# Altium PCB razbot_V02.PcbDoc
Units mm, origin at the board's own origin, x right, y up, seen from the top; angles counter-clockwise.
Board outline 54.86 x 64.9 mm, 2 copper layers (Top Layer, Bottom Layer); 56 components, 76 nets, 244 pads, 71 vias.
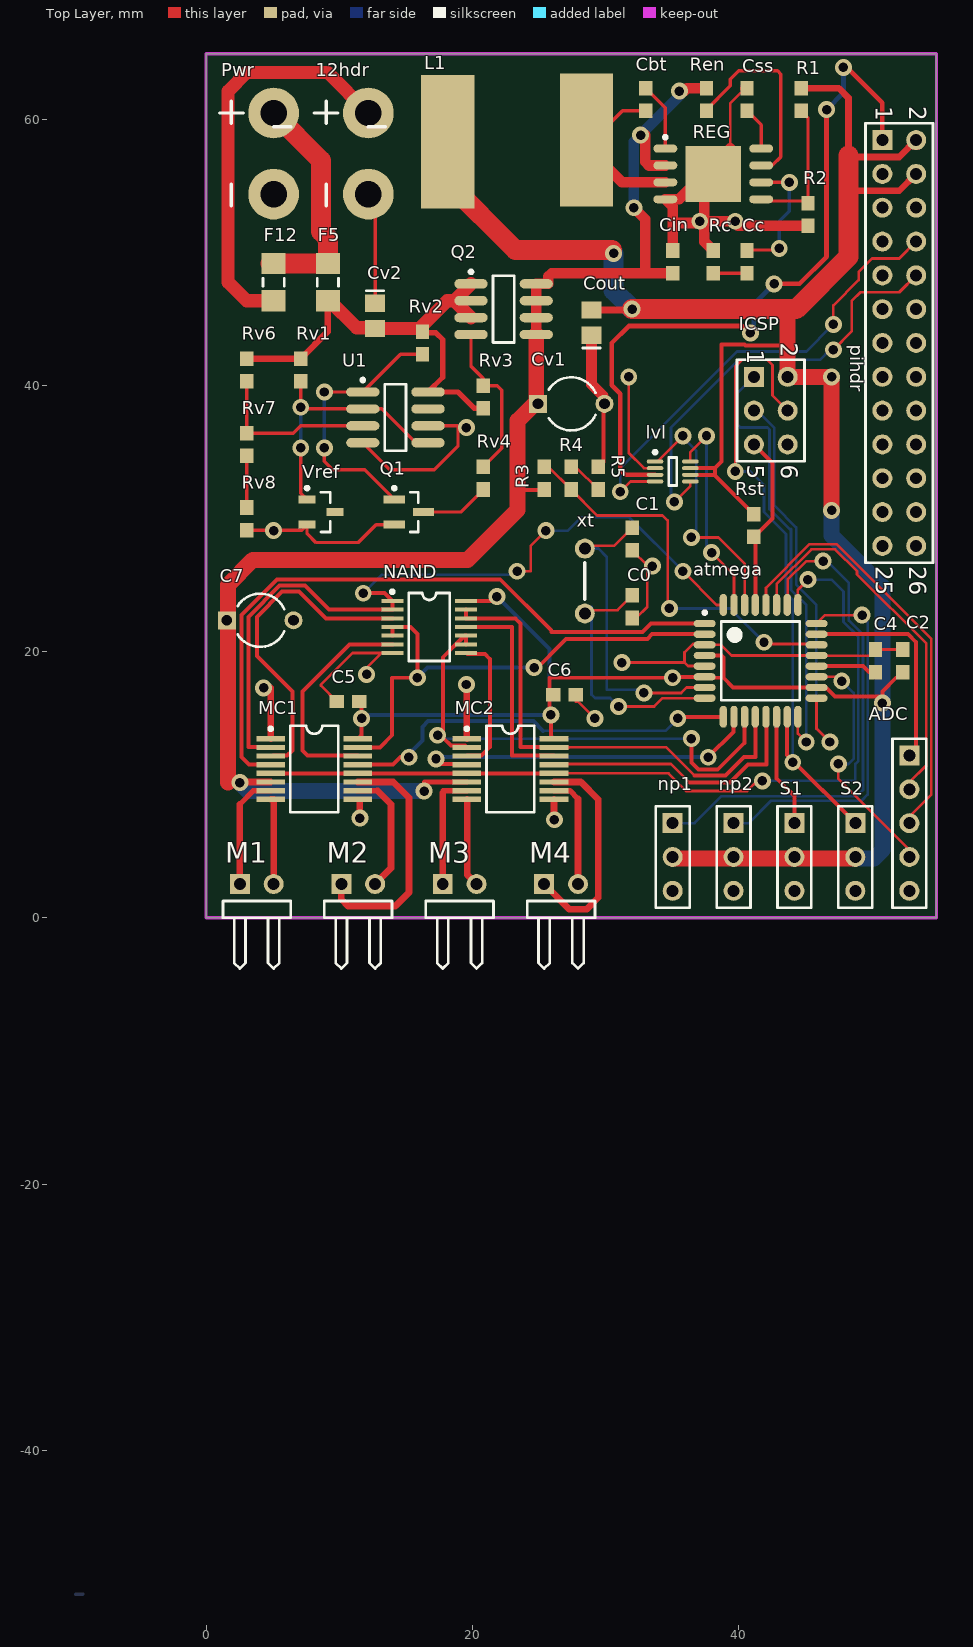
[diagram p0: Top Layer view]
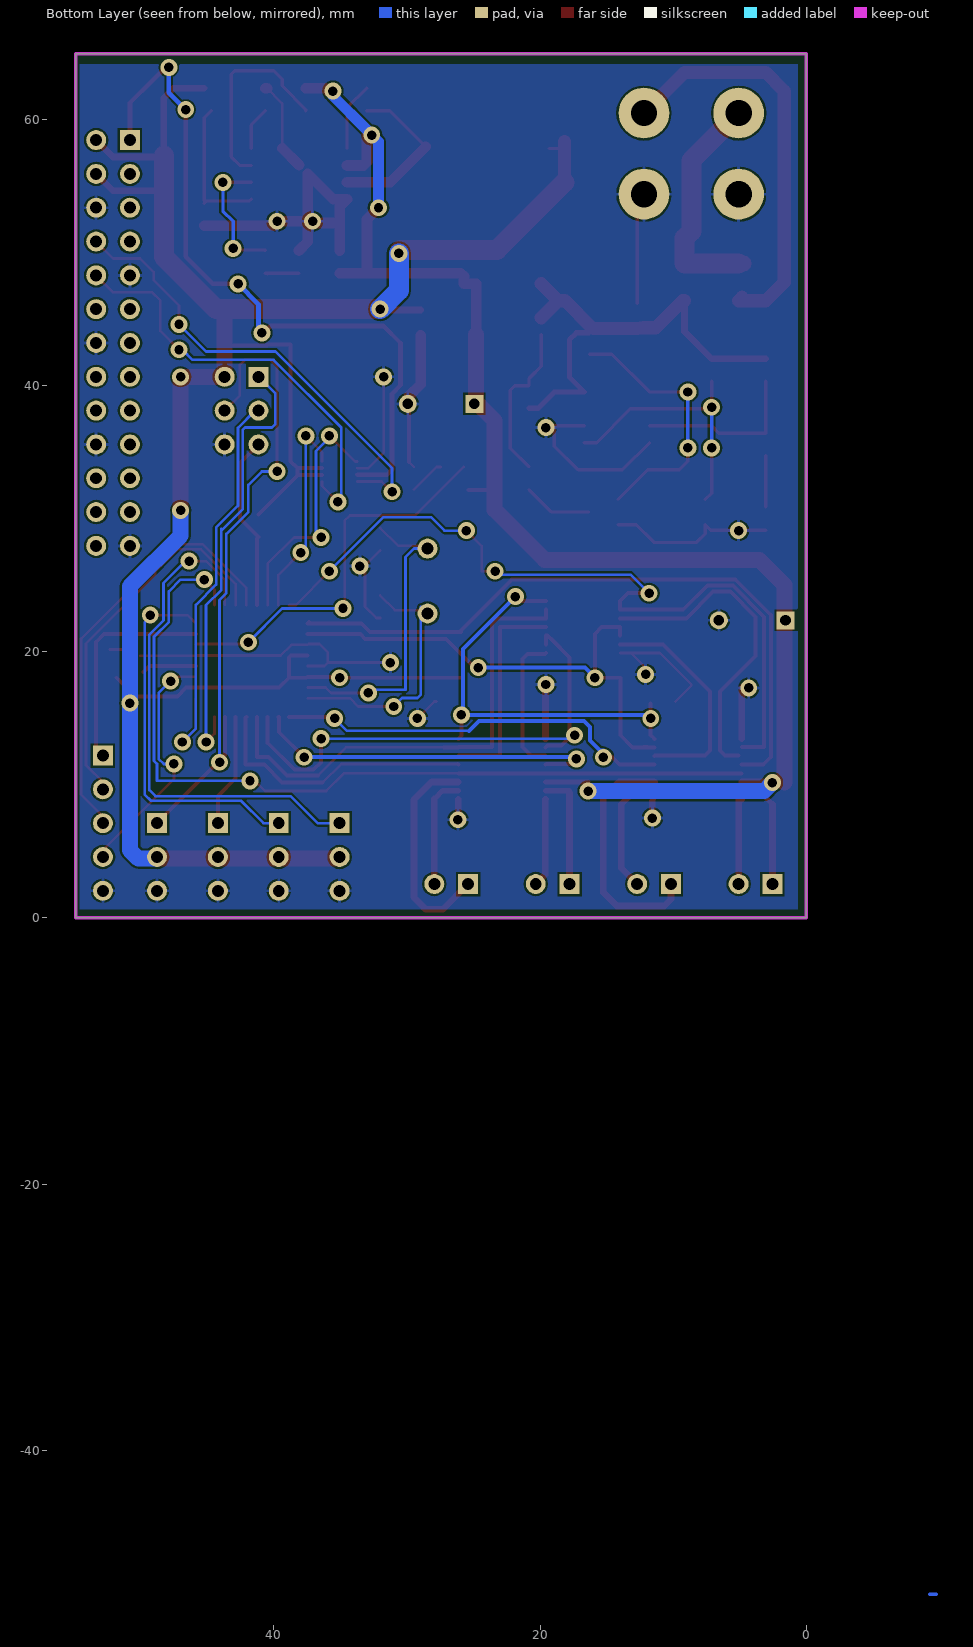
[diagram p1: Bottom Layer view, seen from below]

## Layer stack, top to bottom
Top Layer: signal copper 0.0356
Dielectric: core 0.32, FR-4, Dk 4.8
Bottom Layer: signal copper 0.0356

## Board outline
0,0 54.864,0 54.864,64.897 0,64.897

## Design rules (kind name [scope] priority, off if disabled: settings)
Clearance [All] p1: gap=0.15
PolygonConnect [All] p1: connectstyle=Relief reliefconductorwidth=0.254 reliefentries=4 polygonreliefangle="90 Angle"
RoutingVias [All] p1: holewidth=0.711 width=1.27 viastyle="Through Hole" minholewidth=0.711 minwidth=1.27 maxholewidth=0.711 maxwidth=1.27
SilkscreenOverComponentPads [All] p1: minsilkscreentomaskgap=0.254
SolderMaskExpansion [All] p1: expansion=0.102
TestPointUsage [All] p1: valid=0 allowmultiple=FALSE
Testpoint [All] p1: side=15 testpointundercomponent=TRUE minsize=1.016 maxsize=2.54 preferedsize=1.524 minholesize=0 maxholesize=1.016 preferedholesize=0.813 testpointgrid=0.025 style=1023 order=0-112345678
Width gnd [All] p1: maxlimit=2 minlimit=0.2 preferedwidth=0.2
Width 3.3V [InNet('+3.3V')] p2: maxlimit=1 minlimit=0.254 preferedwidth=0.35
Width 5V [InNet('+5V')] p3: maxlimit=2 minlimit=0.2 preferedwidth=0.35
Width Vbatt [InNet('VBATT')] p4: maxlimit=1.5 minlimit=0.254 preferedwidth=0.8
Width reg1 [InNet('NetCbt_1')] p5: maxlimit=1 minlimit=0.254 preferedwidth=0.3
Width pwr1 [InNet('NetF5_1')] p6: maxlimit=1.5 minlimit=0.254 preferedwidth=1
Width pwr3 [InNet('NetCv2_2')] p7: maxlimit=1 minlimit=0.2 preferedwidth=1
Width pwr2 [InNet('Net12hdr_2')] p8: maxlimit=1 minlimit=0.254 preferedwidth=1
Width motorpins [InNetClass('motorpins')] p9: maxlimit=1 minlimit=0.3 preferedwidth=0.4
Width [All] p10: maxlimit=0.254 minlimit=0.2 preferedwidth=0.254 toplayer_prefwidth=0.2 bottomlayer_prefwidth=0.2 minimp=50.000000 maximp=50.000000 favimp=50.000000
23 further rules are at their usual default settings.

## Classes and differential pairs
component class LwVlt: Cv1 Cv2 Q1 Q2 Rv1 Rv2 Rv3 Rv4 Rv6 Rv7 Rv8 U1 Vref
component class razbot: 12hdr ADC atmega C0 C1 C2 C4 F5 F12 ICSP lvl np1 np2 pihdr Pwr R3 R4 R5 Rst S1 S2 xt
component class U_MotorDriverToshiba: C5 C6 C7 M1 M2 M3 M4 MC1 MC2 NAND
component class U_PwrSupply: Cbt Cc Cin Cout Css L1 R1 R2 Rc REG Ren

## Components (designator, comment, footprint, x,y, rotation, side; value= is the part's Value field where it differs from the comment)
12hdr "Hdr12" PwrPlug1 12.192,54.356 r90 top
ADC "A0A4A5A6A7" HDR1X5 52.832,12.192 r270 top
atmega "ATmega328P-AUR" TQFP32_N 41.656,19.304 r0 top
C0 "20pf 0603" J1-0603 32.004,23.368 r90 top
C1 "20pf 0603" J1-0603 32.004,28.448 r90 top
C2 "0.1uF 0603" J1-0603 52.324,19.304 r270 top
C4 "0.1uF 0603" J1-0603 50.292,19.304 r270 top
C5 "0.1uF 0603" J1-0603 10.668,16.256 r0 top
C6 "0.1uF 0603" J1-0603 26.924,16.764 r180 top
C7 "20uF EL" CAPR5-4X5 4.064,22.352 r0 top
Cbt "10nF 0603" J1-0603 33.02,61.468 r90 top
Cc "3.9nF 0603" J1-0603 40.64,49.276 r270 top
Cin "10uF CAP Cer 0603" J1-0603 35.052,49.276 r270 top
Cout "22uF CAP CER 0805" C0805 28.956,44.704 r90 top
Css "0.1uF CAP CER 0603" J1-0603 40.64,61.468 r270 top
Cv1 "10uF EL" CAPR5-4X5 27.432,38.608 r0 top
Cv2 "0.1uF 0603" C0805 12.7,45.212 r270 top
F5 "Fuse 1206" 3216[1206] 9.144,47.752 r270 top
F12 "Fuse 1206" 3216[1206] 5.08,47.752 r270 top
ICSP "Header 3X2" HDR2X3 41.148,40.64 r270 top
L1 "" Inductor_Paw 23.368,58.42 r180 top
lvl "TXB0102" TSSOP50P310X90-8N 35.052,33.528 r0 top
M1 "Header 2H" HDR1X2H 2.54,2.54 r0 top
M2 "Header 2H" HDR1X2H 10.16,2.54 r0 top
M3 "Header 2H" HDR1X2H 17.78,2.54 r0 top
M4 "Header 2H" HDR1X2H 25.4,2.54 r0 top
MC1 "TB6552FNG" SSOP16 8.128,11.176 r270 top
MC2 "TB6552FNG" SSOP16 22.86,11.176 r270 top
NAND "MM74HC132MTC" TSSOP14 16.764,21.844 r270 top
np1 "neoPix2" HDR1X3 35.052,7.112 r270 top
np2 "neoPix1" HDR1X3 39.624,7.112 r270 top
pihdr "Header 13X2" HDR2X13 50.8,58.42 r270 top
Pwr "Header 2" PwrPlug1 5.08,54.356 r90 top
Q1 "PMBT5550" SOT23_M 15.24,30.48 r0 top
Q2 "AO4407A" SOIC8_M 22.352,45.72 r0 top
R1 "45.3K 0603" J1-0603 44.704,61.468 r90 top
R2 "10K 0603" J1-0603 45.212,52.832 r90 top
R3 "150K 0603" J1-0603 25.4,33.02 r270 top
R4 "100K 0603" J1-0603 27.432,33.02 r270 top
R5 "0 0603" J1-0603 29.464,33.02 r270 top
Rc "13K 0603" J1-0603 38.1,49.276 r270 top
REG "RT8250GSP" SOP-8-C_N 38.1,55.88 r0 top
Ren "100K 0603" J1-0603 37.592,61.468 r90 top
Rst "10K 0603" J1-0603 41.148,29.464 r90 top
Rv1 "10K 0603" J1-0603 7.112,41.148 r270 top
Rv2 "10K 0603" J1-0603 16.256,43.18 r270 top
Rv3 "50K 0603" J1-0603 20.828,39.116 r270 top
Rv4 "10K 0603" J1-0603 20.828,33.02 r90 top
Rv6 "100K 0603" J1-0603 3.048,41.148 r270 top
Rv7 "27K 0603" J1-0603 3.048,35.56 r270 top
Rv8 "6.8K 0603" J1-0603 3.048,29.972 r270 top
S1 "Servo1" HDR1X3 44.196,7.112 r270 top
S2 "Servo2" HDR1X3 48.768,7.112 r270 top
U1 "LM293D" SO8_M 14.224,37.592 r0 top
Vref "LM4040AIM3-2.5" MF03A_N 8.636,30.48 r0 top
xt "16MHz" "Axial 0.2" 28.448,22.86 r90 top

## Footprints (in the part's own frame and the unit in brackets; to place one, negate y for a bottom-side part, rotate by r counter-clockwise, add the part's x,y. Pads: shape width x height; smd on the part's side, far side on the other; paste and mask are expansions set on the pad)
3216[1206] [mm] "Chip Resistor; Body 3.2 x 1.6 mm (LxW typ)"
  rect 1.6x1.8 smd: 1(-1.4,0) 2(1.4,0)
  silkscreen extent -0.3,-0.8 0.3,0.8
"Axial 0.2" [mm]
  round 1.5 hole 0.9: 1(0,0) 2(4.877,0)
  silkscreen extent 1.07,0 3.81,0
C0805 [mm] "Chip Capacitor; Body 2.0 x 1.2 mm (LxW typ)"
  rect 1.3x1.5 smd: 1(-0.95,0) 2(0.95,0)
  silkscreen extent -1.9,-0.65 -1.9,0.65
CAPR5-4X5 [mm] "Capacitor; 2 Leads"
  rect 1.35x1.35 hole 0.8: 1(-2.5,0)
  round 1.35 hole 0.8: 2(2.5,0)
  silkscreen extent -1.69,-2 1.82,2
HDR1X2H [mm] "Connector; Header; 2 Position; Right Angle"
  rect 1.5x1.5 hole 0.9: 1(0,0)
  round 1.5 hole 0.9: 2(2.54,0)
  silkscreen extent -1.27,-6.35 3.81,-1.27
HDR1X3 [mm] "Connector; Header; 3 Position"
  rect 1.5x1.5 hole 0.9: 1(0,0)
  round 1.5 hole 0.9: 2(2.54,0) 3(5.08,0)
  silkscreen extent -1.27,-1.27 6.35,1.27
HDR1X5 [mm] "Connector; Header; 5 Position"
  rect 1.5x1.5 hole 0.9: 1(0,0)
  round 1.5 hole 0.9: 2(2.54,0) 3(5.08,0) 4(7.62,0) 5(10.16,0)
  silkscreen extent -1.27,-1.27 11.43,1.27
HDR2X3 [mm] "Connector; Header; 3x2 Position"
  rect 1.5x1.5 hole 0.9: 1(0,0)
  round 1.5 hole 0.9: 2(0,2.54) 3(2.54,0) 4(2.54,2.54) 5(5.08,0) 6(5.08,2.54)
  silkscreen extent -1.27,-1.27 6.35,3.81
HDR2X13 [mm] "Connector; Header; 13x2 Position"
  rect 1.5x1.5 hole 0.9: 1(0,0)
  round 1.5 hole 0.9: 2(0,2.54) 3(2.54,0) 4(2.54,2.54) 5(5.08,0) 6(5.08,2.54) 7(7.62,0) 8(7.62,2.54) 9(10.16,0) 10(10.16,2.54) 11(12.7,0) 12(12.7,2.54) 13(15.24,0) 14(15.24,2.54) 15(17.78,0) 16(17.78,2.54) 17(20.32,0) 18(20.32,2.54) 19(22.86,0) 20(22.86,2.54) 21(25.4,0) 22(25.4,2.54) 23(27.94,0) 24(27.94,2.54) 25(30.48,0) 26(30.48,2.54)
  silkscreen extent -1.27,-1.27 31.75,3.81
Inductor_Paw [mm]
  rect 4x10 smd: 1(-5.207,0) 2(5.207,0.127)
  body extent -4.77,-4.36 4.19,4.62, height 4
J1-0603 [mm] "Chip Resistor; Body 1.6 x 0.8 mm (LxW typ)"
  rect 1.1x1 smd: 1(-0.85,0) 2(0.85,0)
MF03A_N [mm] "SOT23, 3-Leads, Body 2.9x1.3mm, Pitch 0.95mm, Lead Span 2.4mm, IPC Medium Density"
  rect 1.3x0.6 smd: 1(-1.05,0.95) 2(-1.05,-0.95) 3(1.05,0)
  silkscreen extent -1.17,-1.5 0.7,1.92, body extent -0.7,-1.5 0.7,1.5, height 1.12
PwrPlug1 [mil]
  round 150 hole 78: 1(0,0) 2(240,0)
  silkscreen extent -35,-50 275,160
SO8_M [mm] "SOIC, 8-Leads, Body 4.9x3.9mm, Pitch 1.27mm, IPC Low Density"
  oval 2.5x0.7 smd: 1(-2.45,1.905) 2(-2.45,0.635) 3(-2.45,-0.635) 4(-2.45,-1.905) 5(2.45,-1.905) 6(2.45,-0.635) 7(2.45,0.635) 8(2.45,1.905)
  silkscreen extent -2.57,-2.5 0.8,2.93, body extent -2,-2.5 2,2.5, height 1.75
SOIC8_M [mm] "SOIC, 8-Leads, Body 4.9x3.9mm, Pitch 1.27mm, IPC Low Density"
  oval 2.5x0.7 smd: 1(-2.45,1.905) 2(-2.45,0.635) 3(-2.45,-0.635) 4(-2.45,-1.905) 5(2.45,-1.905) 6(2.45,-0.635) 7(2.45,0.635) 8(2.45,1.905)
  silkscreen extent -2.57,-2.5 0.8,2.93, body extent -2,-2.5 2,2.5, height 1.75
SOP-8-C_N [mm] "8-Pin Small Outline Package 1.27 mm Pitch, IPC Medium Density"
  oval 1.8x0.6 smd: 1(-3.6,1.905) 2(-3.6,0.635) 3(-3.6,-0.635) 4(-3.6,-1.905) 5(3.6,-1.905) 6(3.6,-0.635) 7(3.6,0.635) 8(3.6,1.905)
  rect 4.2x4.2 smd: 9(0,0)
  silkscreen extent -3.72,2.63 -3.47,2.88, body extent -2.11,-2.28 2.11,2.28, height 1.45
SOT23_M [mm] "SOT23, 3-Leads, Body 2.9x1.3mm, Pitch 0.95mm, Lead Span 2.3mm, IPC Low Density"
  rect 1.6x0.6 smd: 1(-1.1,0.95) 2(-1.1,-0.95) 3(1.1,0)
  silkscreen extent -1.22,-1.5 0.7,1.92, body extent -0.7,-1.5 0.7,1.5, height 1.1
SSOP16 [mm] "SSOP; 16 Leads; Body Width 5.3 mm; Pitch 0.65 mm"
  rect 0.4x2.15 smd: 1(-2.275,-3.275) 2(-1.625,-3.275) 3(-0.975,-3.275) 4(-0.325,-3.275) 5(0.325,-3.275) 6(0.975,-3.275) 7(1.625,-3.275) 8(2.275,-3.275) 9(2.275,3.275) 10(1.625,3.275) 11(0.975,3.275) 12(0.325,3.275) 13(-0.325,3.275) 14(-0.975,3.275) 15(-1.625,3.275) 16(-2.275,3.275)
  silkscreen extent -3.25,-3.4 3.25,1.8
TQFP32_N [mm] "32-Pin Plastic Thin Quad Flat Pack (TFQP32), IPC Medium Density"
  oval 1.65x0.55 smd: 1(-4.2,2.8) 2(-4.2,2) 3(-4.2,1.2) 4(-4.2,0.4) 5(-4.2,-0.4) 6(-4.2,-1.2) 7(-4.2,-2) 8(-4.2,-2.8) 17(4.2,-2.8) 18(4.2,-2) 19(4.2,-1.2) 20(4.2,-0.4) 21(4.2,0.4) 22(4.2,1.2) 23(4.2,2) 24(4.2,2.8)
  oval 0.55x1.65 smd: 9(-2.8,-4.2) 10(-2,-4.2) 11(-1.2,-4.2) 12(-0.4,-4.2) 13(0.4,-4.2) 14(1.2,-4.2) 15(2,-4.2) 16(2.8,-4.2) 25(2.8,4.2) 26(2,4.2) 27(1.2,4.2) 28(0.4,4.2) 29(-0.4,4.2) 30(-1.2,4.2) 31(-2,4.2) 32(-2.8,4.2)
  silkscreen extent -4.32,-2.95 2.95,3.75, body extent -3.5,-3.5 3.5,3.5, height 1.2
TSSOP14 [mm] "Shrink Small Outline; 14 Leads; Body Width 4.4 mm; Pitch 0.65 mm"
  rect 0.3x1.65 smd: 1(-1.95,-2.775) 2(-1.3,-2.775) 3(-0.65,-2.775) 4(0,-2.775) 5(0.65,-2.775) 6(1.3,-2.775) 7(1.95,-2.775) 8(1.95,2.775) 9(1.3,2.775) 10(0.65,2.775) 11(0,2.775) 12(-0.65,2.775) 13(-1.3,2.775) 14(-1.95,2.775)
  silkscreen extent -2.77,-2.9 2.55,1.55
TSSOP50P310X90-8N [mm] "TSSOP, 8-Leads, Body 2.1x2.4mm (max), Pitch 0.50mm, IPC Medium Density"
  oval 1.25x0.3 smd: 1(-1.325,0.75) 2(-1.325,0.25) 3(-1.325,-0.25) 4(-1.325,-0.75) 5(1.325,-0.75) 6(1.325,-0.25) 7(1.325,0.25) 8(1.325,0.75)
  silkscreen extent -1.45,-1.05 0.3,1.57, body extent -1.2,-1.05 1.2,1.05, height 0.9

## Part data
12hdr: library part "Header 2", "Header, 2-Pin"
ADC: library part "Header 5", "Header, 5-Pin"
atmega: "8-bit AVR Microcontroller, 32KB Flash, 1KB EEPROM, 2KB SRAM, 32-pin TQFP, Industrial Grade (-40°C to 85°C)"
C0 C1 C2 C4: library part Cap, "Capacitor"
C5 C6 Cbt Cc Cin Cout Css Cv2: library part CAP, "Capacitor"
C7 Cv1: library part Cap2, "Capacitor"
F5: library part "Fuse 1", "Fuse"
F12: library part "Fuse 1", "Fuse 12V 5A"
ICSP: "Header, 3-Pin, Dual row"
L1: library part Inductor, "Inductor"
lvl: "3.3V Level translator"
M1 M2 M3 M4: "Header, 2-Pin, Right Angle"
MC1 MC2: "2CH 1A PMIC"
NAND: "4Ch NAND Gate"
np1 np2 S1 S2: library part "Header 3", "Header, 3-Pin"
pihdr: "Header, 13-Pin, Dual row"
Pwr: "Header, 2-Pin"
Q1: "NPN High-voltage Transistor"
Q2: "P ch MOSFET 12A"
R1 R2 Rc Ren: library part Res3, "Resistor"
R3 R4 R5 Rst Rv1 Rv2 Rv3 Rv4 Rv6 Rv7 Rv8: library part Res2, "Resistor"
REG: "3A 5V Buck Regulator"
U1: "Low-Power Dual Voltage Comparator"
Vref: "Precision Micropower Shunt Voltage Reference"
xt: library part XTAL, "Crystal Oscillator"

## Via types
v1: diameter 1.27, hole 0.711, Top Layer to Bottom Layer, 71 vias

## Nets (pads, with @x,y where several pads share a name; then routed paths per layer and width w, separated by ;. In a path a pad name is that pad's centre, name@x,y a point inside that pad or via, vN(x,y) a via of type N, cw(c..) or ccw(c..) an arc to the next point about the centre after c; other vN are vias at no path point)
+3.3V: lvl.3 pihdr.1 | length 54.4
  Top Layer w0.254: v1@40.767,43.942 v1(40.894,43.942) v1@41.275,43.942
  Top Layer w0.35: lvl.3 31.492,33.278 31.115,33.655 31.115,39.37 30.48,40.005 30.48,43.18 31.75,44.45 40.259,44.45 v1@40.767,43.942 ; v1(42.672,47.625) 44.577,47.625 46.609,49.657 v1(46.609,60.706) ; v1@48.006,64.008 49.022,62.992 50.8,61.214 pihdr.1
  Bottom Layer w0.35: v1@41.148,44.196 41.148,46.101 v1(42.672,47.625) ; v1(46.609,60.706) 47.879,61.976 v1(47.879,63.881)
+5V: atmega.4 atmega.6 atmega.18 C2.2 C5.2 C6.2 Cout.2 ICSP.2 L1.2 lvl.6 lvl.7 MC1.16 MC2.16 NAND.14 np1.2 np2.2 pihdr.2 pihdr.4 R1.2 Rst.2 S1.2 S2.2 | length 267.4
  Top Layer w0.254: L1.2@18.161,57.785 L1.2@19.304,57.785 ; L1.2@18.161,57.785 L1.2@19.304,57.785 ; L1.2@18.161,57.785 L1.2@19.304,57.785 ; L1.2@18.161,57.785 L1.2@19.304,57.785 ; L1.2@18.161,57.785 L1.2@19.304,57.785 ; L1.2@18.161,57.785 L1.2@19.304,57.785 ; L1.2@18.161,57.785 L1.2@19.304,57.785 ; L1.2@18.161,57.785 L1.2@19.304,57.785 ; L1.2@18.161,57.785 L1.2@19.304,57.785
  Top Layer w0.3: MC1.16 11.684,13.732 v1(11.684,14.986) C5.2@11.684,16.09 ; NAND.14 v1@21.799,23.794 ; 25.908,14.605 25.908,13.678 MC2.16 ; v1@25.908,14.986 v1@25.781,15.113 ; v1(35.052,18.034) 25.781,18.034 ; lvl.6 38.223,33.278 38.223,33.778 ; lvl.7 38.223,33.778 ; atmega.4 38.716,19.704 38.862,19.558 38.862,18.034 ; atmega.6@37.526,18.034 38.862,18.034 ; 38.223,33.239 Rst.2 ; 43.688,43.053 43.642,43.007 40.507,43.007 40.461,43.053 38.735,43.053 38.735,34.29 38.223,33.778 ; v1(50.8,16.129) v1@50.8,16.637 ; 51.816,18.034 50.8,17.018 v1@50.8,16.637 ; v1@25.781,15.113 25.781,18.034 ; v1@25.781,15.113 25.781,16.256 25.781,18.034 ; 38.862,18.034 39.592,17.304 atmega.18 46.577,17.304 47.244,16.637 v1@50.8,16.637 ; v1@34.798,18.104 atmega.6 35.052,18.104 v1@34.798,18.104
  Top Layer w0.5: Cout.2 v1@31.938,45.654 ; 45.212,62.318 47.537,62.318 48.26,61.595 48.26,59.182 48.26,57.277 48.387,57.15 52.07,57.15 pihdr.2 ; 48.26,54.61 52.07,54.61 pihdr.4
  Top Layer w1: L1.2@18.161,55.245 18.161,57.785 L1.2
  Top Layer w1.2: 43.688,45.085 43.688,43.053 ICSP.2 v1(46.99,40.64) v1(46.99,30.607) ; pihdr.2@53.34,58.293 pihdr.2 ; np1.2@35.052,4.445 np2.2@39.624,4.445 ; np1.2@35.052,4.445 np2.2@39.624,4.445 ; np1.2@35.052,4.445 np2.2@39.624,4.445 ; np2.2@39.624,4.445 S1.2@44.196,4.445 ; np2.2@39.624,4.445 S1.2@44.196,4.445 ; np2.2@39.624,4.445 S1.2@44.196,4.445 ; S1.2@44.196,4.445 S2.2@48.768,4.445 ; S1.2@44.196,4.445 S2.2@48.768,4.445 ; S1.2@44.196,4.445 S2.2@48.768,4.445
  Top Layer w1.5: L1.2@18.161,55.245 23.241,50.165 v1@30.48,50.165 ; v1(32.004,45.72) 44.323,45.72 48.26,49.657 48.26,54.61 48.26,57.277
  Bottom Layer w0.3: v1(11.684,14.986) 11.926,15.228 25.666,15.228 v1@25.908,14.986 ; v1(21.844,24.13) 25.781,20.193 ; 25.781,20.193 25.781,15.113 25.781,20.193
  Bottom Layer w1.2: v1(46.99,30.607) 46.99,28.702 50.8,24.892 v1(50.8,16.129) 50.8,5.08 50.165,4.445 S2.2@48.768,4.445
  Bottom Layer w1.5: v1(30.607,49.911) 30.607,47.117 v1(32.004,45.72)
  other v1: 25.908,15.24
GND: 12hdr.1 ADC.5 atmega.3 atmega.5 atmega.21 C0.1 C1.1 C2.1 C4.1 C5.1 C6.1 C7.2 Cin.1 Cout.1 Css.1 Cv1.2 Cv2.1 ICSP.6 lvl.2 MC1.1 MC1.9 MC2.1 MC2.9 NAND.7 np1.3 np2.3 pihdr.6 pihdr.9 pihdr.14 pihdr.20 pihdr.25 Pwr.1 Q1.2 R2.1 R5.1 Rc.1 REG.4 REG.9 Rv8.2 S1.3 S2.3 U1.4 U1.6 Vref.2 | length 236.7
  Top Layer w0: Cv1.2@29.845,37.973 Cv1.2@29.845,38.1
  Top Layer w0.2: MC1.1 v1@4.853,17.272 ; C5.1 8.636,17.438 8.636,17.526 11.004,19.894 13.163,19.894 ; MC1.9 MC1.9@11.557,8.747 ; NAND.7 13.163,19.894 ; v1@26.135,7.647 v1@26.162,7.62 ; 27.774,16.256 27.94,16.256 v1(29.21,14.986) ; R5.1 R5.1@29.845,34.251 ; Cv1.2@29.845,38.521 Cv1.2 ; v1(31.242,19.177) 35.941,19.177 ; v1(31.75,40.64) 31.75,34.925 32.893,33.782 33.723,33.782 lvl.2 ; C0.1 32.297,22.518 33.147,23.368 ; C1.1 v1@33.147,26.455 ; atmega.5 37.441,18.919 36.199,18.919 35.941,19.177 ; REG.9@39.37,57.815 39.37,61.176 Css.1@40.512,62.318 ; C4.1@50.037,19.685 atmega.21 39.478,19.704 38.678,20.504 atmega.3 37.386,20.574 36.576,20.574 35.941,19.939 35.941,19.177 ; C4.1 C2.1 ; 13.163,19.894 11.811,18.542 13.163,19.894 ; 33.147,23.368 v1@33.147,26.455 ; 33.147,23.368 33.147,26.416 v1@33.147,26.455
  Top Layer w0.254: U1.4 13.806,33.655 17.145,33.655 18.923,35.433 ; Cv2.1 12hdr.1@12.7,53.848 ; Q1.2 12.766,29.53 11.43,28.194 8.255,28.194 7.586,28.863 Vref.2 7.178,29.122 ; U1.6 18.923,36.957 ; Rv8.2 v1@5.08,29.122 ; Rv8.2 v1@5.08,29.122 ; Rv8.2 v1@5.08,29.122 ; Rv8.2 v1@5.08,29.122 ; Rv8.2 v1@5.08,29.122 ; Rv8.2 v1@5.08,29.122 ; Rv8.2 7.178,29.122 ; Rv8.2 v1@5.08,29.122 ; Rv8.2 v1@5.08,29.122 ; v1@5.08,29.122 7.178,29.122 ; v1@5.08,29.122 7.178,29.122 ; v1@5.08,29.122 7.178,29.122 ; v1@5.08,29.122 7.178,29.122 ; v1@5.08,29.122 7.178,29.122 ; v1@5.08,29.122 7.178,29.122 ; v1@5.08,29.122 7.178,29.122 ; v1@5.08,29.122 7.178,29.122 ; 18.923,35.433 v1@18.923,36.83 ; 18.923,35.433 v1@18.923,36.83 ; 18.923,35.433 v1@18.923,36.83 ; 18.923,35.433 v1@18.923,36.83 ; 18.923,35.433 v1@18.923,36.83 ; 18.923,35.433 v1@18.923,36.83 ; 18.923,35.433 v1@18.923,36.83 ; 18.923,35.433 18.923,36.957 ; 18.923,35.433 v1@18.923,36.83 ; v1@18.923,36.83 18.923,36.957 ; v1@18.923,36.83 18.923,36.957 ; v1@18.923,36.83 18.923,36.957 ; v1@18.923,36.83 18.923,36.957 ; v1@18.923,36.83 18.923,36.957 ; v1@18.923,36.83 18.923,36.957 ; v1@18.923,36.83 18.923,36.957 ; v1@18.923,36.83 18.923,36.957
  Top Layer w0.3: R5.1@29.845,34.251 Cv1.2@29.845,38.521
  Top Layer w0.5: MC1.1 v1@4.853,17.272 ; v1@11.557,7.62 MC1.9@11.557,8.747 ; MC2.1 v1@19.585,17.499 ; v1@26.135,7.647 MC2.9
  Top Layer w0.8: Cout.1 28.956,40.092 Cv1.2@29.845,39.203 ; Cin.1 35.052,52.197 ; v1@37.562,52.324 v1(39.751,52.324) ; Rc.1 37.435,50.791 v1@37.435,52.197 ; REG.9@38.1,56.545 REG.9@39.37,57.815 ; v1@39.956,51.982 R2.1 ; Css.1@40.512,62.318 Css.1 ; 35.052,52.197 v1@37.084,52.197 ; 35.052,52.197 v1@37.084,52.197 ; 35.052,52.197 v1@37.084,52.197 ; 35.052,52.197 v1@37.084,52.197 ; 35.052,52.197 v1@37.084,52.197 ; 35.052,52.197 v1@37.084,52.197 ; 35.052,52.197 v1@37.435,52.197 ; 35.052,52.197 v1@37.084,52.197 ; 35.052,52.197 v1@37.084,52.197 ; 35.052,52.197 35.052,53.423 REG.4 35.53,53.975 REG.9@37.435,55.88 ; v1@37.084,52.197 v1@37.435,52.197 ; v1@37.084,52.197 v1@37.435,52.197 ; v1@37.084,52.197 v1@37.435,52.197 ; v1@37.084,52.197 v1@37.435,52.197 ; v1@37.084,52.197 v1@37.435,52.197 ; v1@37.084,52.197 v1@37.435,52.197 ; v1@37.084,52.197 v1@37.435,52.197 ; v1@37.084,52.197 v1@37.435,52.197 ; v1@37.435,52.197 v1@37.435,52.324 ; v1@37.435,52.197 v1@37.435,52.324 ; v1@37.435,52.197 v1@37.435,52.324 ; v1@37.435,52.197 v1@37.435,52.324 ; v1@37.435,52.197 v1@37.435,52.324 ; v1@37.435,52.197 v1@37.435,52.324 ; v1@37.435,52.197 REG.9@37.435,55.88 ; v1@37.435,52.197 v1@37.435,52.324 ; v1@37.435,52.197 v1@37.435,52.324 ; v1@37.435,52.324 REG.9@37.435,55.88 ; v1@37.435,52.324 REG.9@37.435,55.88 ; v1@37.435,52.324 REG.9@37.435,55.88 ; v1@37.435,52.324 REG.9@37.435,55.88 ; v1@37.435,52.324 REG.9@37.435,55.88 ; v1@37.435,52.324 REG.9@37.435,55.88 ; v1@37.435,52.324 REG.9@37.435,55.88 ; v1@37.435,52.324 REG.9@37.435,55.88
  other v1: 26.162,7.366 11.557,7.493 4.318,17.272 19.558,17.526 12.065,18.288 33.528,26.416 5.08,29.083 19.558,36.83 37.084,52.324
GPIO0(SDA): pihdr.3
GPIO1(SCL): pihdr.5
GPIO4: pihdr.7
GPIO7(CE1): pihdr.26
GPIO8(CE0): pihdr.24
GPIO9(MISO): pihdr.21
GPIO10(MOSI): pihdr.19
GPIO17: pihdr.11
GPIO18: pihdr.12
GPIO21: pihdr.13
GPIO22: pihdr.15
GPIO23: pihdr.16
GPIO24: pihdr.18
GPIO25: pihdr.22
GPIO(SCLK): pihdr.23
MISO: atmega.16 ICSP.1 | length 33.6
  Top Layer w0.2: atmega.16 44.456,13.837 v1(45.085,13.208)
  Bottom Layer w0.2: ICSP.1 39.878,39.37 39.878,37.084 40.132,36.83 42.164,36.83 42.322,36.672 42.322,30.703 43.942,29.083 ; 43.942,29.21 43.942,29.083 ; v1(45.085,13.208) 45.085,23.495 43.942,24.638 43.942,29.083
MOSI: atmega.15 ICSP.4 S2.1 | length 56.6
  Top Layer w0.2: v1(39.751,33.528) 39.751,41.402 40.259,41.91 42.164,41.91 42.545,41.529 42.545,39.243 ICSP.4
  Top Layer w0.3: atmega.15 43.656,12.224 ; 43.656,12.224 S2.1 44.133,11.747 43.656,12.224
  Bottom Layer w0.2: v1(39.751,33.528) 40.894,33.528 41.91,32.512 41.91,30.48 43.561,28.829 43.561,24.384 44.069,23.876 v1(44.069,11.684)
Net12hdr_2: 12hdr.2 F12.2 | length 31.1
  Top Layer w1: F12.2@4.823,46.609 F12.2 3.051,46.352 1.651,47.752 1.651,62.103 3.048,63.5 9.144,63.5 12hdr.2
NetADC_1: ADC.1 atmega.23 | length 16.3
  Top Layer w0.3: atmega.23 52.705,21.336 ; 52.737,21.304 53.34,20.701 ADC.1@53.34,12.446 ; ADC.1 ADC.1@53.086,12.446
NetADC_2: ADC.2 atmega.27 | length 28.4
  Top Layer w0.2: atmega.27 42.856,25.076 45.462,27.682 47.248,27.682 48.895,26.035 48.895,25.8 54.102,20.593 54.102,11.462 52.832,10.192 ADC.2
NetADC_3: ADC.3 atmega.28 | length 32.5
  Top Layer w0.2: atmega.28 42.056,24.784 45.339,28.067 47.371,28.067 54.483,20.955 54.483,9.271 52.832,7.62 ADC.3
NetADC_4: ADC.4 atmega.19 | length 18.3
  Top Layer w0.2: atmega.19 v1@47.428,18.104 ; v1(47.498,11.557) 47.498,10.446 52.832,5.112 ADC.4
  Bottom Layer w0.2: v1(47.498,11.557) 48.26,11.557 48.641,11.938 48.641,16.891 v1(47.752,17.78)
Netatmega_1: atmega.1 MC1.4 | length 50.9
  Top Layer w0.3: MC1.4 3.231,11.501 2.667,12.065 2.667,22.733 5.334,25.4 22.098,25.4 25.893,21.605 ; 25.938,21.463 32.766,21.463 33.407,22.104 atmega.1 atmega.1@37.335,22.225
Netatmega_2: atmega.2 MC1.15 NAND.4 NAND.5 | length 42.2
  Top Layer w0.3: MC1.15 13.055,12.801 13.97,13.716 13.97,18.034 v1(15.875,18.034) 15.875,21.336 15.367,21.844 NAND.4 NAND.5 ; MC1.15@11.939,12.827 MC1.15@12.216,12.827 ; atmega.2 33.496,21.304 33.147,20.955 27.051,20.955 ; 27.051,20.955 24.543,18.447 24.765,18.669 27.051,20.955
  Bottom Layer w0.3: v1(15.875,18.034) 16.637,18.796 v1(24.638,18.796)
Netatmega_7: atmega.7 C1.2 xt.2 | length 23.2
  Top Layer w0.2: xt.2@28.575,27.94 30.646,27.94 C1.2 ; v1(32.893,16.891) 35.687,16.891 36.1,17.304 atmega.7
  Bottom Layer w0.2: xt.2 29.464,27.737 30.099,27.102 30.099,17.145 32.385,17.145 v1@32.639,16.891
Netatmega_8: atmega.8 C0.2 xt.1 | length 26.7
  Top Layer w0.2: v1(30.988,15.875) 33.655,15.875 34.284,16.504 atmega.8 ; C0.2 30.9,23.114 xt.1@28.829,23.114 ; xt.1@28.829,23.114 28.575,23.368 28.765,23.177 xt.1@28.829,23.114
  Bottom Layer w0.2: v1(30.988,15.875) 30.353,16.51 29.21,16.51 28.956,16.764 ; 28.956,16.764 28.956,23.368 28.956,22.86 28.956,16.764
Netatmega_9: atmega.9 MC1.13 | length 30
  Top Layer w0.3: MC1.13 14.041,11.501 14.605,12.065 v1(15.24,12.065) ; v1@35.551,15.104 atmega.9
  Bottom Layer w0.2: 25.319,14.051 34.498,14.051 v1(35.433,14.986)
  Bottom Layer w0.3: 25.319,14.051 24.592,14.778 16.683,14.778 16.256,14.351 16.256,13.335 v1@15.494,12.573 ; v1@15.494,12.573 15.24,12.573 v1@15.494,12.573
Netatmega_10: atmega.10 MC2.4 | length 27.7
  Top Layer w0.3: MC2.4 19.529,11.557 v1@17.526,11.557 ; v1(37.719,12.065) 39.624,13.97 39.624,15.072 atmega.10 ; v1@17.526,11.557 17.018,12.065 17.209,11.874 v1@17.526,11.557
  Bottom Layer w0.3: v1@17.399,12.065 v1(37.719,12.065)
  other v1: 17.272,11.938
Netatmega_11: atmega.11 MC2.2 NAND.9 NAND.10 | length 47
  Top Layer w0.3: 19.152,20.93 17.78,19.558 NAND.10@19.44,21.218 ; NAND.10@19.44,21.194 NAND.10 NAND.9 ; MC2.2 19.435,12.951 18.386,12.951 v1@17.78,13.557 ; v1(36.449,13.462) 36.449,11.684 37.003,11.13 38.435,11.13 40.456,13.151 atmega.11 ; v1@17.78,13.557 17.78,19.534 17.78,13.716 v1@17.78,13.557
  Bottom Layer w0.2: v1@17.526,13.462 v1(36.449,13.462)
  Bottom Layer w0.3: v1@17.399,13.589 v1@17.526,13.462
  other v1: 17.399,13.716
Netatmega_12: atmega.12 MC2.15 NAND.12 NAND.13 | length 37.4
  Top Layer w0.2: MC2.15 34.57,12.801 36.691,10.68
  Top Layer w0.3: NAND.13 NAND.12 23.226,22.494 23.622,22.098 23.622,12.827 MC2.15@26.109,12.827 ; MC2.15 MC2.15@27.204,12.801 ; 36.691,10.68 39.001,10.68 40.405,12.084 41.256,12.084 ; atmega.12 41.256,12.084 ; 41.275,12.065 41.256,12.084
Netatmega_13: atmega.13 MC2.13 | length 20.8
  Top Layer w0.2: MC2.13@26.191,11.557 34.925,11.557 36.322,10.16
  Top Layer w0.3: MC2.13 MC2.13@26.191,11.557 ; 36.322,10.16 39.37,10.16 40.711,11.501 42.108,11.501 42.108,15.052 atmega.13
Netatmega_14: atmega.14 S1.1 | length 8.5
  Top Layer w0.3: atmega.14 42.856,10.484 44.196,9.144 S1.1
Netatmega_20: atmega.20 C4.2 | length 4.1
  Top Layer w0.3: atmega.20 49.334,18.904 49.784,18.454
Netatmega_22: atmega.22 R3.1 R4.2 | length 29.6
  Top Layer w0.2: R3.1@25.732,33.87 R4.2 29.376,30.226 34.29,30.226 34.671,29.845 v1@34.671,22.987 ; v1@41.91,20.574 45.786,20.574 atmega.22
  Bottom Layer w0.2: v1(34.798,23.241) 39.37,23.241 v1(41.91,20.701)
Netatmega_24: atmega.24 np2.1 | length 28.2
  Top Layer w0.2: atmega.24 46.485,22.733 v1(49.276,22.733)
  Bottom Layer w0.2: np2.1 40.767,7.112 42.449,8.794 49.229,8.794 49.691,9.256 49.691,22.191 v1@49.403,22.479 ; v1@49.022,22.606 49.118,22.51 49.085,22.543 v1@49.022,22.606
Netatmega_25: atmega.25 MC1.5 MC1.12 MC2.5 MC2.12 | length 66.2
  Top Layer w0.2: MC2.12 34.742,10.851 36.068,9.525 40.64,9.525 ; atmega.25 44.456,24.644 v1(45.212,25.4) ; 40.64,9.525 41.656,10.541 41.593,10.477 40.64,9.525
  Top Layer w0.3: MC1.5 MC1.12 MC2.5 MC2.12
  Bottom Layer w0.2: v1(41.783,10.287) 48.768,10.287 48.768,11.57 48.991,11.793 48.991,21.113 47.879,22.225 47.879,24.511 46.99,25.4 v1(45.212,25.4)
Netatmega_26: atmega.26 np1.1 | length 38.8
  Top Layer w0.2: atmega.26 43.688,23.536 43.688,25.4 45.085,26.797 v1(46.355,26.797)
  Bottom Layer w0.2: np1.1 36.703,7.112 38.735,9.144 48.895,9.144 49.341,9.59 49.341,21.271 48.279,22.333 48.279,25.146 v1@46.628,26.797
Netatmega_30: atmega.30 lvl.1 | length 25.3
  Top Layer w0.2: lvl.1 33.897,34.278 v1(35.814,36.195) ; v1(36.449,28.575) 38.481,28.575 40.456,26.6 atmega.30
  Bottom Layer w0.2: v1(35.814,36.195) 35.814,36.068 36.83,35.052 ; 36.83,35.052 36.83,28.575 36.83,35.052
Netatmega_31: atmega.31 lvl.8 | length 25.3
  Top Layer w0.2: lvl.8 36.377,34.98 v1(37.592,36.195) ; v1(37.973,27.432) 39.656,25.749 atmega.31
  Bottom Layer w0.2: v1@37.592,27.051 v1(37.592,36.195) 37.592,27.432 v1@37.592,27.051
Netatmega_32: atmega.32 MC1.2 NAND.1 NAND.2 | length 70.5
  Top Layer w0.2: v1(23.368,26.035) 24.384,26.035 24.384,27.94 v1(25.527,29.083) ; v1(35.814,26.035) 38.345,23.504 atmega.32
  Top Layer w0.3: MC1.2@4.827,12.827 3.175,12.827 3.175,22.605 5.52,24.95 7.435,24.95 9.241,23.144 NAND.2 NAND.1 13.399,24.384 v1(11.811,24.384)
  Bottom Layer w0.2: v1(11.811,24.384) 13.208,25.781 ; v1(25.527,29.083) 27.178,29.083 28.194,30.099 31.75,30.099 v1(35.814,26.035) ; 13.208,25.781 23.368,25.781 13.208,25.781
  Bottom Layer w0.3: v1(11.811,24.384) v1@11.938,24.384
NetCbt_1: Cbt.1 L1.1 REG.3 | length 43.2
  Top Layer w0.254: Cbt.1 31.281,60.618 ; L1.1@28.575,57.912 31.281,60.618 ; L1.1@28.575,57.912 31.281,60.618 ; L1.1@28.575,57.912 31.281,60.618 ; L1.1@28.575,57.912 31.281,60.618 ; L1.1@28.575,57.912 31.281,60.618 ; L1.1@28.575,57.912 31.281,60.618 ; L1.1@28.575,57.912 31.281,60.618 ; L1.1@28.575,57.912 31.281,60.618 ; L1.1@28.575,57.912 28.829,58.166 31.281,60.618
  Top Layer w0.8: L1.1@28.575,57.912 31.242,55.245 REG.3
NetCbt_2: Cbt.2 REG.1 | length 5.1
  Top Layer w0.254: Cbt.2 34.5,60.838 REG.1
NetCc_1: Cc.1 REG.6 | length 14.5
  Top Layer w0.254: Cc.1 40.679,50.165 v1@42.672,50.165 ; REG.6 v1(43.815,55.245) v1@44.069,55.245 ; v1@42.672,50.165 v1@42.926,50.419 ; v1@42.672,50.165 v1@42.926,50.419 ; v1@42.672,50.165 v1@42.926,50.419 ; v1@42.672,50.165 v1@42.926,50.419 ; v1@42.672,50.165 v1@42.926,50.419 ; v1@42.672,50.165 v1@42.926,50.419 ; v1@42.672,50.165 v1@43.053,50.546 ; v1@42.672,50.165 v1@42.926,50.419 ; v1@42.672,50.165 v1@42.926,50.419 ; v1@42.926,50.419 v1@43.053,50.546 ; v1@42.926,50.419 v1@43.053,50.546 ; v1@42.926,50.419 v1@43.053,50.546 ; v1@42.926,50.419 v1@43.053,50.546 ; v1@42.926,50.419 v1@43.053,50.546 ; v1@42.926,50.419 v1@43.053,50.546 ; v1@42.926,50.419 v1@43.053,50.546 ; v1@42.926,50.419 v1@43.053,50.546
  Bottom Layer w0.254: v1(43.053,50.292) 43.053,52.324 43.815,53.086 v1(43.815,55.245)
NetCc_2: Cc.2 Rc.2 | length 2.6
  Top Layer w0.254: Rc.2 Cc.2@40.513,48.426 ; Cc.2@40.474,48.387 Cc.2@40.513,48.426 ; Cc.2 Cc.2@40.513,48.426
NetCss_2: Css.2 REG.8 | length 3.3
  Top Layer w0.254: Css.2 41.7,59.558 REG.8
NetCv2_2: Cv2.2 F5.2 Q2.1 Q2.2 Q2.3 Rv1.1 Rv2.1 Rv3.2 Rv6.1 U1.8 | length 89.1
  Top Layer w0.4: Rv2.1 16.344,43.942 17.272,43.942 17.78,43.434 17.78,40.603 U1.8 18.923,39.497 20.154,38.266 Rv3.2
  Top Layer w0.5: Rv6.1 Rv1.1 9.144,44.03 F5.2
  Top Layer w1: F5.2 9.274,46.352 11.303,44.323 12.256,44.323 Cv2.2 Rv2.1@16.024,44.262 ; Rv2.1@16.024,44.262 18.117,46.355 ; Rv2.1@16.024,44.262 18.117,46.355 ; Rv2.1@16.024,44.262 18.117,46.355 ; Rv2.1@16.024,44.262 18.117,46.355 ; Rv2.1@16.024,44.262 18.117,46.355 ; Rv2.1@16.024,44.262 18.117,46.355 ; Rv2.1@16.024,44.262 18.117,46.355 ; Rv2.1@16.024,44.262 18.117,46.355 ; Rv2.1@16.024,44.262 18.117,46.355 ; 18.117,46.355 18.632,46.355 ; 18.632,46.355 19.267,46.99 ; 18.632,46.355 19.267,46.99 ; 18.632,46.355 19.267,45.72 ; 18.632,46.355 19.267,45.72 ; 18.632,46.355 19.267,45.72 ; 18.632,46.355 19.267,45.72 ; 18.632,46.355 19.267,45.72 ; 18.632,46.355 19.267,45.72 ; 18.632,46.355 19.267,45.72 ; 18.632,46.355 19.267,46.99 ; 18.632,46.355 19.267,46.99 ; 18.632,46.355 19.267,45.72 ; 18.632,46.355 19.267,46.99 ; 18.632,46.355 19.267,46.99 ; 18.632,46.355 19.267,46.99 ; 18.632,46.355 19.267,45.72 ; 18.632,46.355 19.267,46.99 ; 18.632,46.355 19.267,45.72 ; 18.632,46.355 19.267,46.99 ; 19.267,45.72 Q2.3 ; 19.267,45.72 Q2.3 ; 19.267,45.72 Q2.3 ; 19.267,45.72 Q2.3 ; 19.267,45.72 Q2.3 ; 19.267,45.72 Q2.3 ; 19.267,45.72 Q2.3 ; 19.267,45.72 Q2.3 ; 19.267,45.72 Q2.3 ; 19.267,45.72 Q2.3 ; 19.267,46.99 Q2.1 ; 19.267,46.99 Q2.1 ; 19.267,46.99 Q2.1 ; 19.267,46.99 Q2.1 ; 19.267,46.99 Q2.1 ; 19.267,46.99 Q2.1 ; 19.267,46.99 Q2.1 ; 19.267,46.99 Q2.1 ; 19.267,46.99 Q2.1
NetF5_1: F5.1 F12.1 Pwr.2 | length 17.4
  Top Layer w1.2: F12.1@4.696,49.152 F12.1
  Top Layer w1.5: F12.1 F5.1 9.144,51.054 8.636,51.562 8.636,56.896 Pwr.2
NetM1_1: M1.1 MC1.7 | length 8.7
  Top Layer w0.4: 2.54,8.534 3.557,9.551 MC1.7
  Top Layer w0.5: M1.1 2.54,8.534
NetM1_2: M1.2 MC1.8 | length 6.6
  Top Layer w0.5: MC1.8 5.08,8.901 M1.2
NetM2_1: M2.1 MC1.11 | length 18.3
  Top Layer w0.5: M2.1 10.16,1.397 10.668,0.889 14.224,0.889 15.24,1.905 15.24,9.017 14.056,10.201 MC1.11
NetM2_2: M2.2 MC1.10 | length 9.4
  Top Layer w0.4: MC1.10 12.877,9.551
  Top Layer w0.5: M2.2 13.894,3.734 13.894,8.534 12.877,9.551
NetM3_1: M3.1 MC2.7 | length 8.8
  Top Layer w0.4: 17.806,9.551 MC2.7
  Top Layer w0.5: M3.1@17.78,2.413 17.78,9.398
NetM3_2: M3.2 MC2.8 | length 6.7
  Top Layer w0.5: MC2.8 19.609,8.901 19.609,3.251 M3.2
NetM4_1: M4.1 MC2.11 | length 16.5
  Top Layer w0.5: M4.1 27.305,0.635 28.575,0.635 29.464,1.524 29.464,8.89 28.153,10.201 MC2.11
NetM4_2: M4.2 MC2.10 | length 8.5
  Top Layer w0.4: MC2.10 27.33,9.551 27.94,8.941
  Top Layer w0.5: M4.2 27.94,8.941
NetMC1_3: MC1.3 NAND.3 | length 24.3
  Top Layer w0.3: MC1.3@5.08,12.192 6.096,12.192 6.477,12.573 ; 6.477,12.726 6.477,17.018 3.81,19.685 3.81,22.603 5.707,24.5 6.996,24.5 9.002,22.494 NAND.3
NetMC1_14: MC1.14 NAND.6 | length 17
  Top Layer w0.3: MC1.14 11.362,12.192 7.62,12.192 7.239,12.573 7.239,17.018 10.765,20.544 NAND.6
NetMC2_3: MC2.3 NAND.8 | length 10.6
  Top Layer w0.3: NAND.8 19.621,19.812 20.955,19.812 21.31,19.457 21.31,12.827 20.675,12.192 19.626,12.192 MC2.3
NetMC2_14: MC2.14 NAND.11 | length 16.2
  Top Layer w0.3: NAND.11 22.987,21.844 22.987,12.192 MC2.14@26.094,12.192
NetQ1_1: Q1.1 Rv2.2 U1.1 | length 20.1
  Top Layer w0.254: v1(8.89,35.306) 8.89,34.29 9.525,33.655 11.915,33.655 Q1.1 ; v1(8.89,39.497) U1.1 14.607,42.33 Rv2.2
  Bottom Layer w0.254: v1(8.89,35.306) v1@8.89,39.37
NetQ1_3: Q1.3 Rv4.1 | length 5.2
  Top Layer w0.254: Q1.3 19.138,30.48 Rv4.1
NetQ2_4: Q2.4 Rv3.1 Rv4.2 | length 12.1
  Top Layer w0.254: Q2.4 19.902,41.439 20.828,40.513 Rv3.1 21.883,39.966 22.225,39.624 22.225,35.267 Rv4.2
NetR1_1: R1.1 R2.2 REG.5 | length 10.6
  Top Layer w0.254: REG.5 41.827,53.848 45.046,53.848 R2.2 ; R1.1 45.212,60.11 R2.2@45.212,53.848
NetR4_1: R4.1 R5.2 | length 2.7
  Top Layer w0.2: R4.1 27.764,33.87 R5.2
NetREG_7: REG.7 Ren.1 | length 15.3
  Top Layer w0.254: Ren.1 37.592,60.712 39.37,62.49 39.37,62.992 40.005,63.627 42.926,63.627 43.18,63.373 43.18,57.15 42.545,56.515 REG.7
NetRv1_2: Rv1.2 U1.2 U1.5 Vref.1 | length 58.6
  Top Layer w0.254: v1(7.112,35.306) 7.112,31.904 Vref.1 ; Rv1.2 v1(7.112,38.354) v1@7.112,38.227 ; U1.5 15.748,35.687 13.208,38.227 U1.2 ; v1@7.112,38.227 U1.2 ; v1@7.112,38.227 U1.2 ; v1@7.112,38.227 U1.2 ; v1@7.112,38.227 U1.2 ; v1@7.112,38.227 U1.2 ; v1@7.112,38.227 U1.2 ; v1@7.112,38.227 U1.2 ; v1@7.112,38.227 U1.2 ; v1@7.112,38.227 U1.2
  Bottom Layer w0.254: v1(7.112,38.354) v1@7.112,35.433 ; v1@7.112,35.433 v1@7.175,35.369 ; v1@7.112,35.433 v1@7.175,35.369 ; v1@7.112,35.433 v1@7.175,35.369 ; v1@7.112,35.433 v1@7.175,35.369 ; v1@7.112,35.433 v1@7.175,35.369 ; v1@7.112,35.433 v1@7.175,35.369 ; v1@7.112,35.433 v1@7.239,35.306 ; v1@7.112,35.433 v1@7.175,35.369 ; v1@7.112,35.433 v1@7.175,35.369 ; v1@7.175,35.369 v1@7.239,35.306 ; v1@7.175,35.369 v1@7.239,35.306 ; v1@7.175,35.369 v1@7.239,35.306 ; v1@7.175,35.369 v1@7.239,35.306 ; v1@7.175,35.369 v1@7.239,35.306 ; v1@7.175,35.369 v1@7.239,35.306 ; v1@7.175,35.369 v1@7.239,35.306 ; v1@7.175,35.369 v1@7.239,35.306
NetRv6_2: Rv6.2 Rv7.1 U1.3 | length 12.8
  Top Layer w0.254: Rv6.2 Rv7.1 6.565,36.41 7.112,36.957 U1.3
NetRv7_2: Rv7.2 Rv8.1 | length 3.8
  Top Layer w0.254: Rv8.1@3.048,30.861 Rv7.2
RESET: atmega.29 ICSP.5 Rst.1 | length 13.3
  Top Layer w0.3: ICSP.5 42.545,34.163 42.545,30.011 Rst.1 41.256,28.506 atmega.29
RXD: lvl.5 pihdr.10 | length 32
  Top Layer w0.2: v1(35.179,31.242) 36.377,32.44 lvl.5 ; v1(47.117,42.672) 48.514,44.069 48.514,46.355 49.149,46.99 52.07,46.99 pihdr.10
  Bottom Layer w0.2: v1(35.179,31.242) 34.929,31.492 34.929,36.834 40.005,41.91 46.101,41.91 v1@46.863,42.672
SCK: atmega.17 ICSP.3 | length 31.1
  Top Layer w0.2: atmega.17 45.856,14.215 v1(46.863,13.208)
  Bottom Layer w0.2: ICSP.3 41.389,38.1 42.688,36.801 42.688,30.959 ; 42.729,30.918 44.323,29.324 44.323,29.21 44.327,29.206 44.327,25.033 45.847,23.513 45.847,19.685 45.847,14.224 v1(46.863,13.208)
TXD: lvl.4 pihdr.8 | length 35
  Top Layer w0.2: v1(31.115,32.004) 31.889,32.778 lvl.4 ; v1(47.117,44.577) 47.117,45.991 49.022,47.896 49.022,48.514 50.038,49.53 52.07,49.53 pihdr.8
  Bottom Layer w0.2: v1(31.115,32.004) 31.115,33.782 39.878,42.545 45.085,42.545 v1@46.99,44.45
VBATT: C7.1 Cin.2 Cv1.1 MC1.6 MC2.6 Q2.5 Q2.6 Q2.7 Q2.8 R3.2 REG.2 Ren.2 | length 153.4
  Top Layer w0.3: 23.495,32.131 R3.2@25.361,32.131
  Top Layer w0.4: 16.424,10.201 MC2.6
  Top Layer w0.5: 1.778,10.16 v1(2.54,10.16) ; v1@2.54,10.201 MC1.6 v1@2.54,10.201
  Top Layer w0.8: Q2.5 24.79,43.815 Q2.6@24.79,45.085 ; Q2.6 Q2.6@24.79,45.085 ; Q2.7 Q2.7@24.79,46.355 ; v1(32.131,53.34) 32.995,52.476 32.995,48.426 ; REG.2 33.274,56.515 32.995,56.794 ; Cin.2 32.995,48.426 ; v1(35.56,62.103) 35.916,62.103 36.131,62.318 Ren.2 ; Q2.6@24.79,45.085 Q2.7@24.79,46.355 ; Q2.6@24.79,45.085 Q2.7@24.79,46.355 ; Q2.6@24.79,45.085 Q2.7@24.79,46.355 ; Q2.6@24.79,45.085 Q2.7@24.79,46.355 ; Q2.6@24.79,45.085 Q2.7@24.79,46.355 ; Q2.6@24.79,45.085 Q2.7@24.79,46.355 ; Q2.6@24.79,45.085 Q2.7@24.79,46.355 ; Q2.6@24.79,45.085 Q2.7@24.79,46.355 ; Q2.6@24.79,45.085 Q2.7@24.79,46.355 ; Q2.7@24.79,46.355 Q2.8@24.79,47.625 ; Q2.7@24.79,46.355 Q2.8@24.79,47.625 ; Q2.7@24.79,46.355 Q2.8@24.79,47.625 ; Q2.7@24.79,46.355 Q2.8@24.79,47.625 ; Q2.7@24.79,46.355 Q2.8@24.79,47.625 ; Q2.7@24.79,46.355 Q2.8@24.79,47.625 ; Q2.7@24.79,46.355 Q2.8@24.79,47.625 ; Q2.7@24.79,46.355 Q2.8@24.79,47.625 ; Q2.7@24.79,46.355 Q2.8@24.79,47.625 ; Q2.8@24.79,47.625 Q2.8 Q2.8@25.705,47.625 ; Q2.8@25.705,47.625 25.705,48.172 ; Q2.8@25.705,47.625 25.705,48.172 ; Q2.8@25.705,47.625 25.705,48.172 ; Q2.8@25.705,47.625 25.705,48.172 ; Q2.8@25.705,47.625 25.705,48.172 ; Q2.8@25.705,47.625 25.705,48.172 ; Q2.8@25.705,47.625 25.705,48.172 ; Q2.8@25.705,47.625 25.705,48.172 ; Q2.8@25.705,47.625 25.705,48.172 ; 25.705,48.172 25.959,48.426 32.995,48.426 ; 32.995,56.794 v1@32.995,58.801 ; 32.995,56.794 v1@32.995,58.801 ; 32.995,56.794 v1@32.995,58.801 ; 32.995,56.794 v1@32.995,58.801 ; 32.995,56.794 v1@32.995,58.801 ; 32.995,56.794 v1@32.995,58.801 ; 32.995,56.794 v1@32.995,58.801 ; 32.995,56.794 v1@32.995,58.801 ; 32.995,56.794 v1@32.995,58.801
  Top Layer w1.2: 1.651,10.16 1.651,22.352 1.651,25.019 3.516,26.884 19.645,26.884 23.407,30.646 23.407,37.343 24.802,38.738 Q2.5
  Bottom Layer w0.8: v1(32.131,53.34) 32.131,58.293 v1(32.639,58.801) ; v1@32.995,59.182 35.56,61.747 v1(35.56,62.103)
  Bottom Layer w1.2: v1(2.54,10.16) 3.175,9.525 v1(16.383,9.525)
pads on no net: pihdr.17 U1.7 Vref.3
copper on no net: | length 0.5
  Bottom Layer w0.254: -9.779,-50.8 -9.271,-50.8

## Polygon pours and split planes (outlines as drawn)
GND on Bottom Layer "GNDlayer" (solid, remove dead copper, pour order 1000): 0.635,64.135 0.635,0.635 54.61,0.635 54.61,64.135

## Keep-outs
Keep-Out Layer:
  the board outline again, w0.254

## Silkscreen, mask and mechanical layers (free items; w line width, h text height)
Mechanical 15:
  the board outline again, w0.254

## Text inside footprints (layer, text, board x,y; h text height)
ICSP: Top Overlay "1" at 40.64,42.672 h1.27 r270; Top Overlay "2" at 43.18,43.18 h1.27 r270; Top Overlay "5" at 40.64,34.036 h1.27 r270; Top Overlay "6" at 43.18,34.036 h1.27 r270
pihdr: Top Overlay "26" at 52.832,26.416 h1.27 r270; Top Overlay "25" at 50.292,26.416 h1.27 r270; Top Overlay "1" at 50.292,60.96 h1.27 r270; Top Overlay "2" at 52.832,60.96 h1.27 r270